# Altium PCB PMODBob.PcbDoc
Units mil, origin at the board's own origin, x right, y up, seen from the top; angles counter-clockwise.
Board outline 2997.03 x 1232.03 mil, 2 copper layers (Top Layer, Bottom Layer); 29 components, 27 nets, 145 pads, 38 vias.
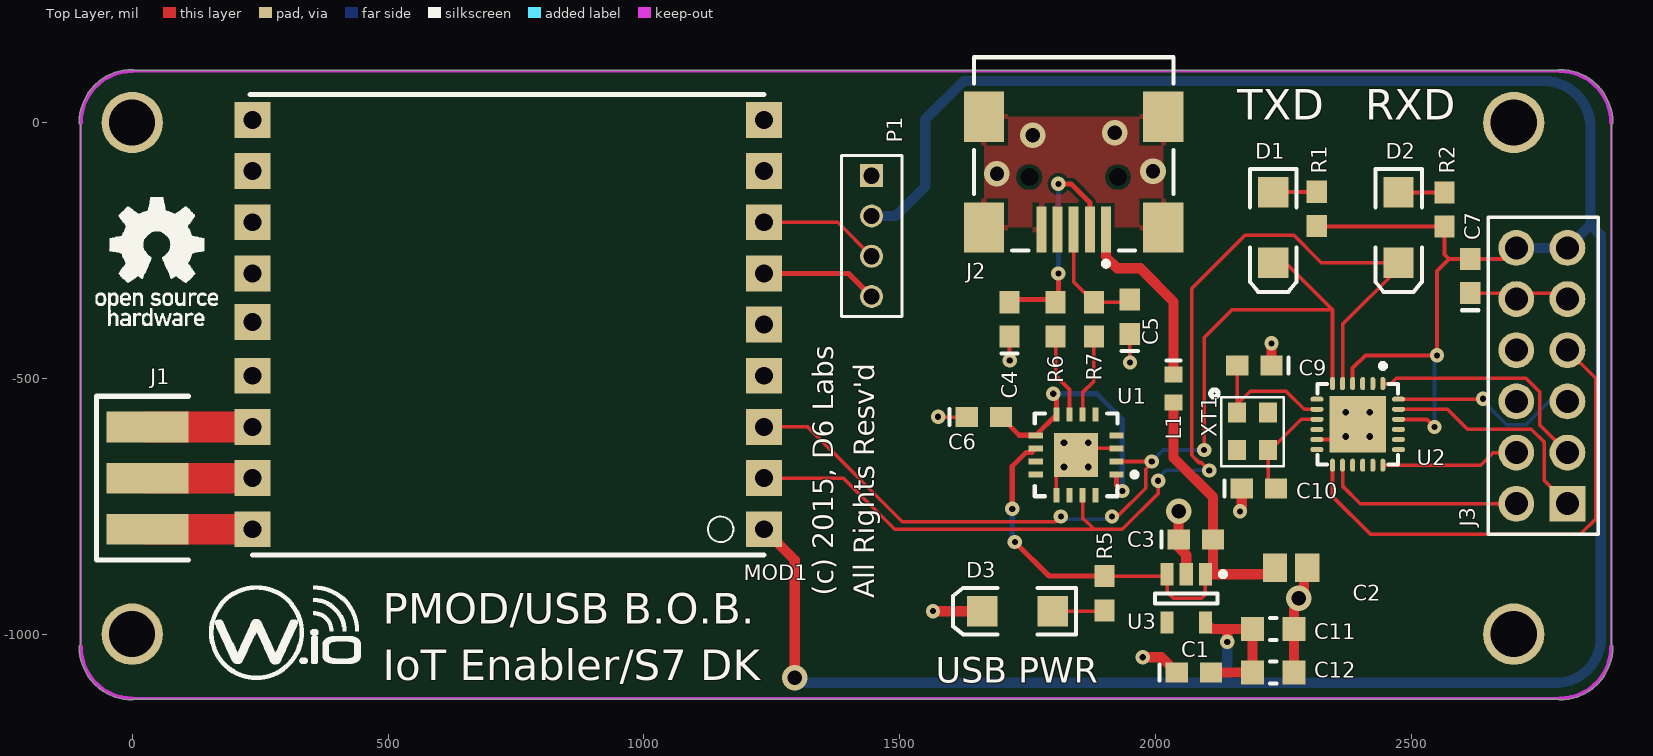
[diagram p0: Top Layer view]
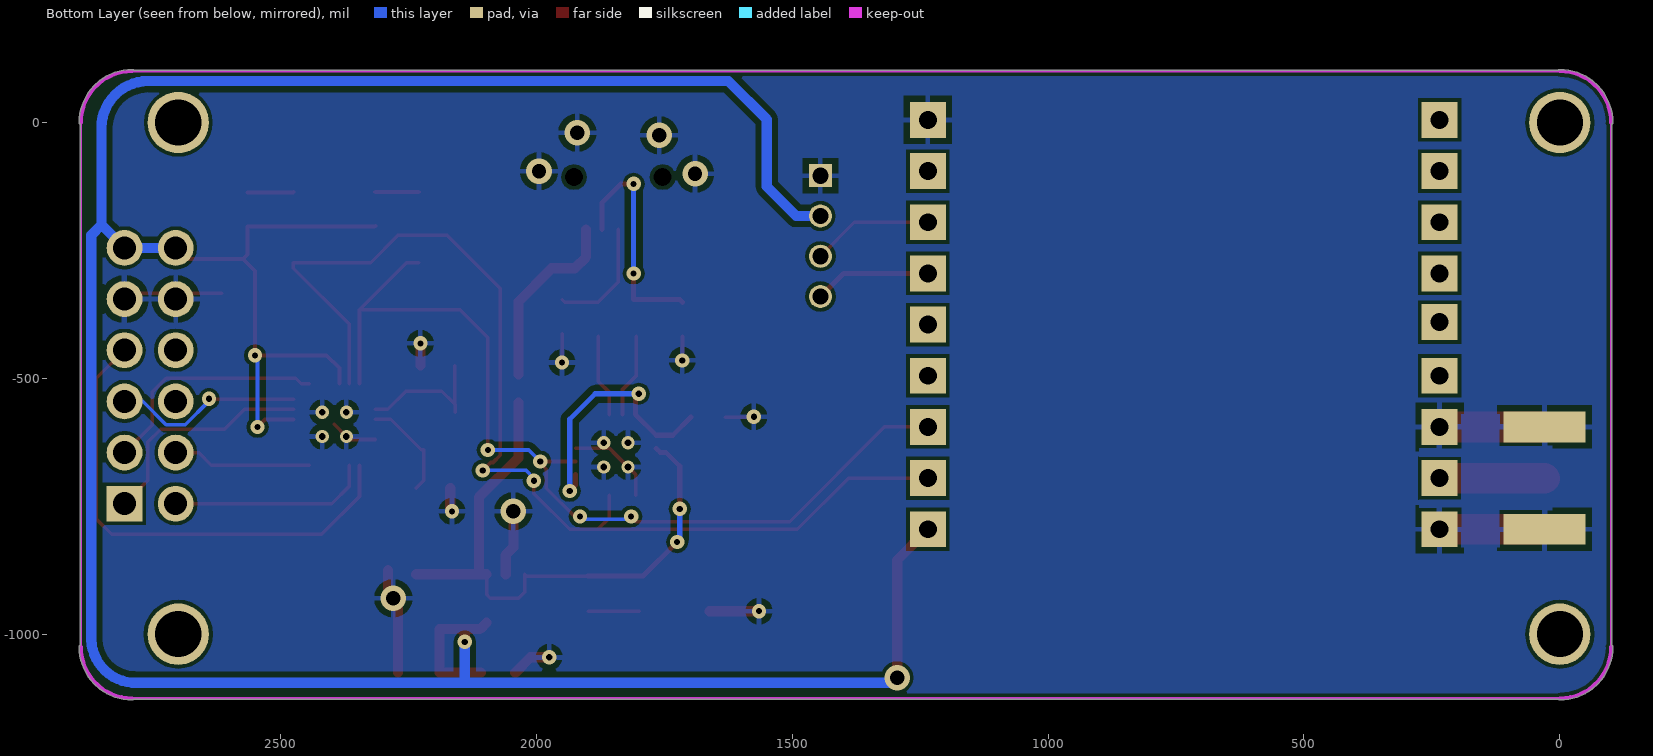
[diagram p1: Bottom Layer view, seen from below]

## Layer stack, top to bottom
Top Layer: signal copper 1.4
Dielectric: dielectric 12.6, FR-4, Dk 4.8
Bottom Layer: signal copper 1.4

## Board outline
-103.52,-1025 cw(c-100,-1025) -101.98,-1022.1 -101.98,-2.9 cw(c-100,0) -103.52,0 cw(c0,0) 0,103.52 cw(c0,100) 2.9,101.98 2787.1,101.98 cw(c2790,100) 2790,103.52 cw(c2790,0) 2893.52,0 cw(c2890,0) 2891.98,-2.9 2891.98,-1022.1 cw(c2890,-1025) 2893.52,-1025 cw(c2790,-1025) 2790,-1128.51 cw(c2790,-1125) 2787.1,-1126.98 2.9,-1126.98 cw(c0,-1125) 0,-1128.51 cw(c0,-1025)

## Design rules (kind name [scope] priority, off if disabled: settings)
Clearance Clearance_1 [InNet('GND') vs OnLayer('Bottom Layer')] p1: gap=12
Clearance [All] p2: gap=7
ComponentClearance [All] p1 off: gap=10 collisioncheckmode=3 verticalgap=10 showdistances=FALSE
Height [All] p1 off: minheight=0 maxheight=1000 prefheight=500
HoleToHoleClearance [All] p1 off: gap=10 allowstackedmicrovias=TRUE
MinimumSolderMaskSliver [All] p1 off: minsoldermaskwidth=10
PolygonConnect [All] p1: connectstyle=Relief reliefconductorwidth=10 reliefentries=4 polygonreliefangle="90 Angle"
RoomDefinition PMODBob [InComponentClass('PMODBob')] p1 off: confinementstyle=ConfineIn formatcopy=TRUE lockcomponents=FALSE outline 85,-1105 2910,-1105 2910,25 85,25
RoutingVias [All] p1: holewidth=28 width=50 viastyle="Through Hole" minholewidth=12 minwidth=28 maxholewidth=28 maxwidth=50
SilkToSilkClearance [All] p1 off: silktosilkclearance=10
SilkscreenOverComponentPads [All] p1 off: minsilkscreentomaskgap=10
SolderMaskExpansion SolderMaskExpansion_1 [IsVia] p1: expansion=-20
SolderMaskExpansion [All] p2: expansion=4
Width [All] p1: maxlimit=100 minlimit=7 preferedwidth=10
22 further rules are at their usual default settings.

## Classes and differential pairs
component class PMODBob: C1 C2 C3 C5 C7 C9 C11 C12 D1 D2 D3 J1 J2 J3 L1 MOD1 P1 R1 R2 R5 U1 U2 U3 XT1

## Components (designator, comment, footprint, x,y, rotation, side; value= is the part's Value field where it differs from the comment)
C1 "C0603" 0603 2075,-1075 r0 top
C2 "Cap Pol3" 2029 2265,-870 r0 top
C3 "C0603" 0603 2078.9,-815 r0 top
C4 "C0603" 0603 1714.57,-384.68 r90 top
C5 "C0603" 0603 1949.57,-379.68 r90 top
C6 "C0603" 0603 1664.57,-575.79 r0 top
C7 "C0603" 0603 2615,-300 r90 top
C9 "C0603" 0603 2193.25,-475 r180 top
C10 "C0603" 0603 2201.75,-715 r0 top
C11 "1UF" D6_0603_RES 2230,-990 r180 top
C12 ".01uF" D6_0603_RES 2230,-1075 r180 top
D1 "RXD" 3.2X1.6X1.1 2230,-205 r270 top
D2 "TXD" 3.2X1.6X1.1 2475,-205 r270 top
D3 "POWER" 3.2X1.6X1.1 1730,-955 r180 top
J1 "SMA" RPSMA-EDGEMOUNT 30,-695 r180 top
J2 "440479-1" 440479 1840,100 r90 top
J3 "PMOD Type 2A Connector" Type2A 2805,-745 r180 top
L1 "Inductor" INDC1608L 2035,-520 r270 top
MOD1 "WhiskerModule" whisker 1235,-795 r180 top
P1 "E1" 2MM4PINHDR 1445,-103.9 r270 top
R1 "330" ERA-0603 2315,-168.9 r90 top
R2 "330" ERA-0603 2565,-170 r90 top
R5 "330" ERA-0603 1900,-920 r270 top
R6 "27" ERA-0603 1804.57,-384.68 r90 top
R7 "27" ERA-0603 1879.57,-384.68 r90 top
U1 "FT230X" QFN65P400X400X75-16N 1844.57,-649.68 r180 top
U2 "XR20M1170" QFN50P400X400X80-24N 2395,-590 r270 top
U3 "MCP1824T-3302E/OT" SOT-23-OT5_N 2060,-930 r270 top
XT1 "2.5X3.2MM" 2.5x3.2 2220,-566.64 r270 top

## Footprints (in the part's own frame and the unit in brackets; to place one, negate y for a bottom-side part, rotate by r counter-clockwise, add the part's x,y. Pads: shape width x height; smd on the part's side, far side on the other; paste and mask are expansions set on the pad)
2.5x3.2 [mil]
  rect 39x35 smd: 1(0,-61) 2(73,-61) 3(73,0) 4(0,0)
  silkscreen extent -44,-112 105,31
2MM4PINHDR [mil]
  rect 45x45 hole 31.89: 1(0,0)
  round 45 hole 31.89: 2(78.74,0) 3(157.48,0) 4(236.22,0)
  silkscreen extent -39,-59 276,59
3.2X1.6X1.1 [mm] "SMT LED; 2 Flat Leads"
  rect 1.5x1.5 smd: 1(-1.75,0) 2(1.75,0)
  silkscreen extent -2.9,-1.15 3.2,1.15
0603 [mm] "Chip Capacitor; Body 1.6 x 0.8 mm (LxW typ)"
  rect 1.1x1 smd: 1(-0.85,0) 2(0.85,0)
  silkscreen extent -1.7,-0.4 -1.7,0.4
2029 [mm] "Chip Inductor, Body 2.0x1.2mm, IPC High Density"
  rect 1.2x1.4 smd: 1(-0.8,0) 2(0.8,0)
  body extent -1.1,-0.7 1.1,0.7, height 0.55
440479 [mm] "Connector; USB2.0, Type AB, SM; 5 Position; Right Angle"
  rect 2.3x0.5 smd: 1(-7.85,-1.6) 2(-7.85,-0.8) 3(-7.85,0) 4(-7.85,0.8) 5(-7.85,1.6)
  rect 2.5x2 smd: 6(-7.75,4.45) 7(-2.25,4.45) 8(-7.75,-4.45) 9(-2.25,-4.45)
  round 0.6 hole 0.9 unplated: MH1(-5.25,2.2) MH2(-5.25,-2.2)
  silkscreen extent -9.67,-4.95 0.7,4.95
D6_0603_RES [mm] "Chip Resistor, 2-Leads, Body 2.0x1.2mm, IPC Medium Density"
  rect 1.14x1.2 smd: 1(-1.025,0) 2(1.025,0)
  silkscreen extent -0.15,-0.55 0.15,0.55, body extent -0.93,-0.41 0.77,0.39, height 0.56
ERA-0603 [mm] "Chip Resistor; Body 1.6 x 0.8 mm (LxW typ)"
  rect 1.1x1 smd: 1(-0.85,0) 2(0.85,0)
INDC1608L [mm] "Chip Inductor, Body 1.6x0.8mm, IPC High Density"
  rect 0.8x0.9 smd: 1(-0.7,0) 2(0.7,0)
  silkscreen extent -1.4,-0.35 -1.4,0.35, body extent -0.87,-0.48 0.87,0.48, height 0.55
QFN50P400X400X80-24N [mm] "QFN, 24-Leads, Body 4.0x4.0mm (max), Pitch 0.50mm, IPC Medium Density"
  oval 0.65x0.25 smd: 1(-2.025,1.25) 2(-2.025,0.75) 3(-2.025,0.25) 4(-2.025,-0.25) 5(-2.025,-0.75) 6(-2.025,-1.25) 13(2.025,-1.25) 14(2.025,-0.75) 15(2.025,-0.25) 16(2.025,0.25) 17(2.025,0.75) 18(2.025,1.25)
  oval 0.25x0.65 smd: 7(-1.25,-2.025) 8(-0.75,-2.025) 9(-0.25,-2.025) 10(0.25,-2.025) 11(0.75,-2.025) 12(1.25,-2.025) 19(1.25,2.025) 20(0.75,2.025) 21(0.25,2.025) 22(-0.25,2.025) 23(-0.75,2.025) 24(-1.25,2.025)
  rect 2.8x2.8 smd: 25(0,0)
  silkscreen extent -3.02,-2 2,2, body extent -2.03,-2.03 1.99,1.99, height 1
QFN65P400X400X75-16N [mm] "QFN, 16-Leads, Body 4.1x4.1mm (max), Pitch 0.65mm, IPC Medium Density"
  rect 0.7x0.3 smd: 1(-2,0.975) 2(-2,0.325) 3(-2,-0.325) 4(-2,-0.975) 9(2,-0.975) 10(2,-0.325) 11(2,0.325) 12(2,0.975)
  rect 0.3x0.7 smd: 5(-0.975,-2) 6(-0.325,-2) 7(0.325,-2) 8(0.975,-2) 13(0.975,2) 14(0.325,2) 15(-0.325,2) 16(-0.975,2)
  rect 2.2x2.2 smd: 17(0,0)
  silkscreen extent -3.03,-2.05 2.05,2.05, body extent -2.03,-2.02 2.02,2.03, height 0.75
RPSMA-EDGEMOUNT [mil]
  rect 160x60 smd: 1(0,0) 2(0,100) 3(0,-100)
  rect 160x60 smd far side: 4(0,-100) 5(0,100)
  silkscreen extent -80,-160 100,160
SOT-23-OT5_N [mm] "SOT23, 5-Leads, Body 2.9x1.6mm, Pitch 0.95mm, Lead Span 2.7mm, IPC Medium Density"
  rect 1.1x0.65 smd: 1(-1.2,0.95) 2(-1.2,0) 3(-1.2,-0.95) 4(1.2,-0.95) 5(1.2,0.95)
  silkscreen extent -1.32,-1.55 0.25,1.95, body extent -0.9,-1.55 0.9,1.55, height 1.45
Type2A [mil]
  rect 70x70 hole 45: 1(0,0)
  round 70 hole 45: 2(0,-100) 3(0,-200) 4(0,-300) 5(0,-400) 6(0,-500) 7(100,0) 8(100,-100) 9(100,-200) 10(100,-300) 11(100,-400) 12(100,-500)
  silkscreen extent -60,-560 155,60
whisker [mil]
  rect 70x70 hole 35: 1(0,0) 2(0,-100) 3(0,-200) 4(0,-300) 5(0,-400) 6(0,-500) 7(0,-600) 8(0,-700) 9(0,-800) 10(1000,-800) 11(1000,-700) 12(1000,-600) 13(1000,-500) 14(1000,-405) 15(1000,-300) 16(1000,-200) 17(1000,-100) 18(1000,0)
  silkscreen extent 0,-850 1005,50

## Part data
C1 C3 C4 C5 C6 C7 C9 C10: "Ceramic Chip Capacitor - Standard"
C2: "Polarized Capacitor (Surface Mount)"
C11 C12: library part C1210, "Ceramic Chip Capacitor - Standard"
D1 D2 D3: library part LED2, "Typical RED, GREEN, YELLOW, AMBER GaAs LED"
J2: "USB 2.0, Right Angle, SMT, AB Type, Receptacle, 5 Position, Black"
MOD1: "Whisker Footprint"
P1: library part 2MM4PINHDR
R1 R2 R5 R6 R7: library part ERA3Y, "Rectangular Thick Film Chip Resistor, 10 Ohm to 330k Ohm Range, 0.1% and 0.5% Tolerance, 0603 Size, 0.063 W"
U1: "FT230X USB TO BASIC UART IC"
U2: "I2C/SPI UART with 64-byte FIFO"
U3: "300 mA, Low Voltage, Low Quiescent Current LDO Regulator, 5-Pin SOT-23, Extended Temperature, Tape and Reel"
XT1: "3.2 X 2.5 MM"

## Free pads (board coordinates)
  round 120 hole 90 unplated paste-900: 0(0,0) 1(2700,0) 2(0,-1000) 2(2700,-1000)

## Via types
v1: diameter 28, hole 12, Top Layer to Bottom Layer, 23 vias
v2: diameter 25.98, hole 12.99, Top Layer to Bottom Layer, tented top, 8 vias
v3: diameter 50, hole 28, Top Layer to Bottom Layer, 7 vias

## Nets (pads, with @x,y where several pads share a name; then routed paths per layer and width w, separated by ;. In a path a pad name is that pad's centre, name@x,y a point inside that pad or via, vN(x,y) a via of type N, cw(c..) or ccw(c..) an arc to the next point about the centre after c; other vN are vias at no path point)
GND: C1.1 C2.2 C3.1 C4.1 C5.1 C6.1 C7.1 C9.1 C10.1 C11.1 C12.1 D3.2 J1.2 J1.3 J1.4 J1.5 J2.4 J2.5 J2.6 J2.7 J2.8 J2.9 J3.5 J3.11 MOD1.9 MOD1.16 MOD1.18 P1.1 U1.3 U1.13 U1.17 U2.11 U2.25 U3.2 | length 1627.7
  Top Layer w7: v1(1575,-575) 1575.79,-575.79 C6.1 ; C4.1 1714.57,-464.57 v1(1715,-465) ; U1.13 1806.18,-688.07 U1.17 1857.36,-636.89 U1.3 ; C5.1 1949.57,-469.57 v1(1950,-469.13) ; U2.11 2365.47,-619.53 v2(2371.38,-613.62) U2.25 ; C7.1 2793.46,-333.46 J3.5
  Top Layer w20: v1(1565,-955) D3.2 ; v1(1975,-1045) 2011.54,-1045 C1.1 ; v3@2045,-770 2045,-830 2060,-845 U3.2 ; v1(2165,-760) 2168.28,-756.72 C10.1 ; C9.1 v1(2226.72,-431.72) ; C12.1 C11.1 2270.35,-939.45 v3(2279.8,-930) 2290,-919.8 C2.2@2290,-875
  Top Layer w60: J1.2 MOD1.18 ; J1.3 MOD1.16
  other v2: 1820.94,-673.31 1868.19,-673.31 1820.94,-626.06 1868.19,-626.06 2418.62,-613.62 2371.38,-566.38 2418.62,-566.38
  other v3: 2045,-760 1690,-100 1995,-95 1760,-25 1920,-20
NetC4_2: C4.2 J2.2 R6.2 | length 452.6
  Top Layer w10: C4.2 1720,-345.79 1810,-345.79 v1(1810,-295) ; v1(1810,-120) 1835,-120 1871.5,-156.5 J2.2
  Bottom Layer w10: v1(1810,-295) v1(1810,-120)
NetC5_2: C5.2 J2.3 R7.2 | length 230.6
  Top Layer w7: J2.3 1840,-311.66 R7.2 1944.57,-351.22 C5.2
NetC6_2: C6.2 U1.1 U1.8 U1.9 | length 515.6
  Top Layer w10: C6.2 1733.54,-611.3 U1.9 U1.8 1806.18,-536.18 v1(1800,-530) ; U1.1 1923.31,-708.31 v1(1935,-720)
  Bottom Layer w10: v1(1800,-530) 1885,-530 1935,-580 v1(1935,-720)
NetC9_2: C9.2 U2.8 XT1.1 | length 272.6
  Top Layer w7: XT1.1 2159,-551 XT1.1@2159.79,-550.21 ; C9.2 XT1.1@2159.79,-550.21 ; U2.8 2290.47,-560.47 2255,-525 2185,-525 XT1.1@2159.79,-550.21
NetC10_2: C10.2 U2.9 XT1.3 | length 201.6
  Top Layer w7: C10.2 2220,-699.79 XT1.3 2225.36,-639.64 2284.84,-580.16 U2.9
NetD1_1: D1.1 R1.2 | length 85.3
  Top Layer w8: D1.1 2230.67,-135.43 R1.2
NetD1_2: D1.2 MOD1.3 U1.2 U2.6 | length 1883
  Top Layer w7: MOD1.3 1320,-595 1505,-780 1805,-780 v1(1815,-770) ; v1(1915,-770) 1925,-770 1980.5,-714.5 1980.5,-677.83 1992.52,-665.81 v1(1992.52,-662.48) U1.2 ; v1(2095,-640) 2095,-420 2149.21,-365.79 2345.79,-365.79 ; D1.2 2253.9,-273.9 2345.79,-365.79 ; U2.6 2345.79,-365.79
  Bottom Layer w7: v1(1815,-770) 1820,-775 1910,-775 v1(1915,-770) ; v1(1992.52,-662.48) 2015,-640 v1(2095,-640)
NetD2_1: D2.1 R2.2 | length 90.2
  Top Layer w8: D2.1 2475.43,-136.54 R2.2
NetD2_2: D2.2 MOD1.2 U1.15 U2.5 | length 2177
  Top Layer w7: MOD1.2 1390,-695 1490,-795 1880,-795 ; U1.15 1857.36,-772.36 1880,-795 ; v1(2005,-700) 2005,-725 1935,-795 1880,-795 ; v1(2105,-680) 2089.5,-664.5 2084.85,-664.5 2070.5,-650.15 2070.5,-324.5 2175,-220 2270,-220 2323.9,-273.9 D2.2 2475,-285 2365.47,-394.53 U2.5
  Bottom Layer w7: v1(2005,-700) 2005,-695 2020,-680 v1(2105,-680)
NetD3_1: D3.1 R5.2 | length 99.6
  Top Layer w7: D3.1 R5.2@1898.46,-955
NetJ1_1: J1.1 MOD1.17 | length 205
  Top Layer w60: J1.1 MOD1.17
NetJ2_1: J2.1 L1.1 | length 364.4
  Top Layer w20: J2.1 1902.99,-262.99 1925,-285 1970,-285 2035,-350 L1.1
NetJ3_1: J3.1 U2.23 | length 451
  Top Layer w7: U2.23 2570.47,-560.47 2609.5,-599.5 2734.35,-599.5 2760,-625.15 2759.5,-625.65 2759.5,-699.5 J3.1
NetJ3_2: J3.2 U2.1 | length 463.2
  Top Layer w7: U2.1 2459.72,-510.28 2470.5,-499.5 2723.85,-499.5 2750.5,-526.15 2750.5,-590.5 J3.2
NetJ3_3: J3.3 U2.24 | length 372.9
  Top Layer w7: U2.24 2639.21,-540.79 v1(2640,-540)
  Bottom Layer w7: v1(2640,-540) 2640,-544.35 2686.15,-590.5 2723.85,-590.5 2769.35,-545 J3.3
NetJ3_4: J3.4 U2.13 | length 971.2
  Top Layer w7: U2.13 2345.79,-730.79 2420,-805 2830,-805 2860,-775 2860,-500 J3.4
NetJ3_7: J3.7 U2.14 | length 394.6
  Top Layer w7: U2.14 2365.47,-710.47 2400,-745 J3.7
NetJ3_8: J3.8 U2.18 | length 271
  Top Layer w7: U2.18 2635.28,-669.72 2660,-645 J3.8
NetMOD1_4: MOD1.4
NetMOD1_5: MOD1.5
NetMOD1_6: MOD1.6 P1.4 | length 228.7
  Top Layer w10: MOD1.6 1399.88,-295 P1.4
NetMOD1_7: MOD1.7 P1.3 | length 237.5
  Top Layer w7: MOD1.7 1378.62,-195 P1.3
NetR6_1: R6.1 U1.7 | length 164.1
  Top Layer w7: R6.1 1804.57,-494.57 1831.77,-521.77 U1.7
NetR7_1: R7.1 U1.6 | length 162
  Top Layer w7: U1.6 1857.36,-527.64 1879.57,-505.43 R7.1
VCC: C1.2 C7.2 C11.2 C12.2 J3.6 J3.12 MOD1.1 P1.2 R1.1 R2.1 U2.4 U2.22 U3.5 | length 6205.1
  Top Layer w8: R1.1 2316.1,-203.46 R2.1 2565,-258.07 2573.46,-266.54 ; U2.4 2385.16,-479.84 2410,-455 v1(2550,-455) 2550,-290 2573.46,-266.54 ; U2.22 2530.16,-580.16 v1(2545,-595) ; J3.12 2683.46,-266.54 C7.2 2573.46,-266.54
  Top Layer w20: MOD1.1 1295,-855 v3(1295,-1085) ; U3.5 2110.16,-990 2140,-990 ; C1.2 C12.2 C11.2 2140,-990 ; v1(2140,-1015) 2140,-990
  Bottom Layer w8: v1(2545,-595) 2545,-460 v1(2550,-455)
  Bottom Layer w20: v3(1295,-1085) 1305,-1095 2140,-1095 ; P1.2 1492.36,-182.64 1550,-125 1550,6.03 1625,81.03 2758.97,81.03 cw(c2758.97,-10) 2850,-10 2850,-200 ; v1(2140,-1015) 2140,-1095 ; J3.12 J3.6 2850,-200 ; 2140,-1095 2780.76,-1095 ccw(c2783.17,-1008.17) 2870,-1010.58 2870,-220 2850,-200
VCC5V: C2.1 C3.2 L1.2 R5.1 U1.10 U3.1 U3.3 | length 1201
  Top Layer w7: R5.1 2018.82,-886.54 U3.3 2022.6,-917.6 2035,-930 2090,-930 2097.4,-922.6 U3.1
  Top Layer w10: v1(1720,-755) 1720,-671.65 1747.08,-644.57 1758.14,-644.57 U1.10 ; v1(1725,-820) 1791.54,-886.54 R5.1
  Top Layer w20: L1.2 2035,-655 2112.36,-732.36 C3.2 2112.36,-880.12 2115,-882.76 ; U3.1 2115,-882.76 ; C2.1@2235,-882.76 2115,-882.76
  Bottom Layer w10: v1(1720,-755) 1720,-815 v1(1725,-820)
pads on no net: J2.MH1 J2.MH2 J3.9 J3.10 MOD1.8 MOD1.10 MOD1.11 MOD1.12 MOD1.13 MOD1.14 MOD1.15 U1.4 U1.5 U1.11 U1.12 U1.14 U1.16 U2.2 U2.3 U2.7 U2.10 U2.12 U2.15 U2.16 U2.17 U2.19 U2.20 U2.21 U3.4 XT1.2 XT1.4

## Polygon pours and split planes (outlines as drawn)
GND on Bottom Layer "Mid-Layer 1-No Net" (solid, remove dead copper, pour order 6): 15,-570 15,-830 277,-830 275,-828 275,-570
GND on Bottom Layer "Mid-Layer 1-No Net" (solid, remove dead copper, pour order 5): 2890,100 2890,-1125 -100,-1125 -100,100
GND on Keep-Out Layer "Mid-Layer 1-No Net" (solid, remove dead copper): 1630,60 2050,60 2050,-250 1945,-250 1945,-75 1730,-75 1730,-250 1625,-250 1625,60
GND on Top Layer "Mid-Layer 1-No Net" (solid, remove dead copper, pour order 10): 1664.8,-205.12 2015.2,-205.12 2015.2,11.42 1664.8,11.42

## Keep-outs
Keep-Out Layer:
  lines w3.94: -100,-1025 -100,0 ; 0,-1125 2795,-1125 ; 0,100 2790,100 ; 2890,-1030 2890,0
  lines w7: -100,-1025 ccw(c0,-1025) 0,-1125 ; -100,0 cw(c0,0) 0,100 ; 2790,-1125 ccw(c2790,-1025) 2890,-1025 ; 2790,100 cw(c2790,0) 2890,0

## Silkscreen, mask and mechanical layers (free items; w line width, h text height)
Top Overlay:
  drawing of 2020 lines, arcs and shapes, not listed
  text "TXD" at 2160,5 h60
  text "RXD" at 2410,5 h60
  text "(c) 2015, D6 Labs" at 1370,-925 h40 r90
  text "All Rights Resv'd" at 1450,-930 h40 r90
  text "PMOD/USB B.O.B." at 490,-980 h60
  text "IoT Enabler/S7 DK" at 490,-1090 h60
  text "USB PWR" at 1570,-1095 h50

## Text inside footprints (layer, text, board x,y; h text height)
J2: Mechanical 1 "PCB Edge" at 1998.91,117.02 h9.84 r180